# EAGLE board screenModule (EAGLE 7.5.0)
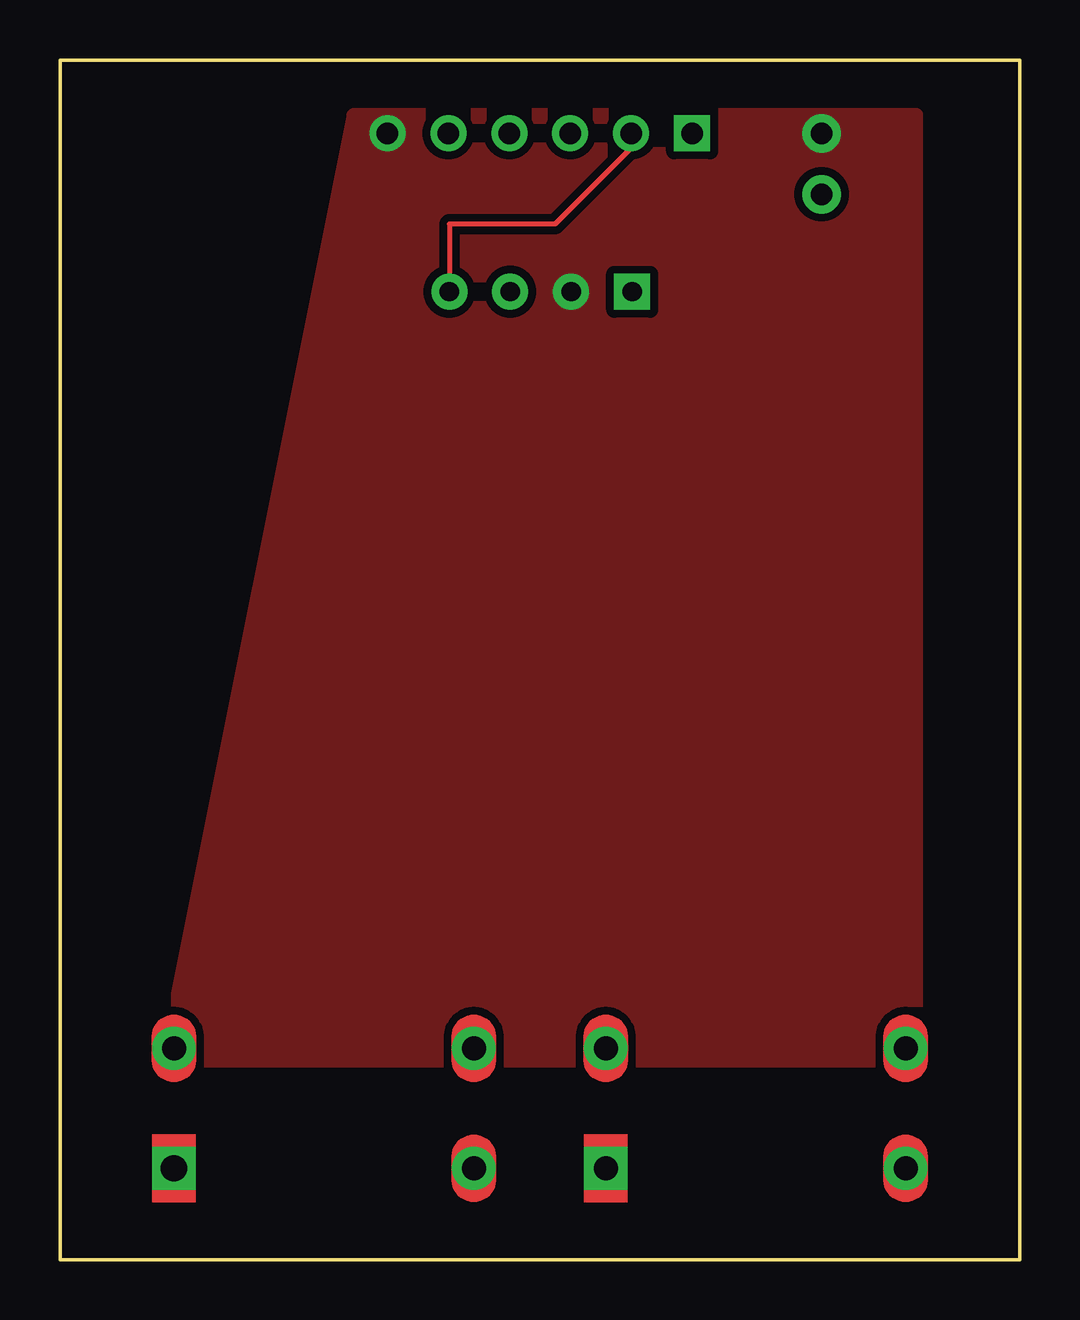
[diagram p0: board, top side]
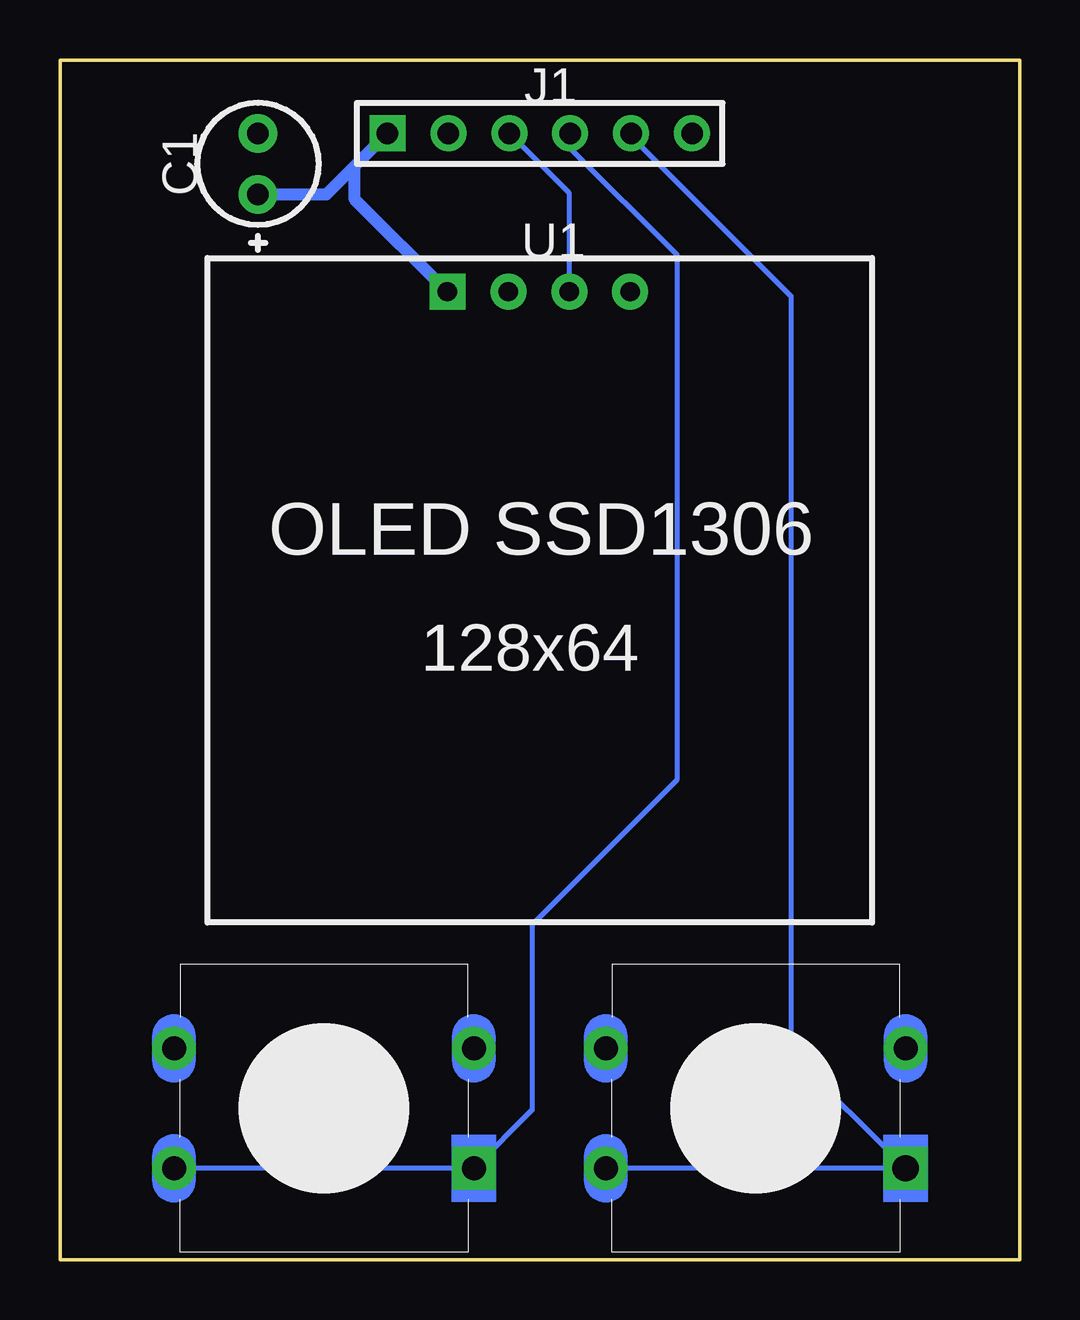
[diagram p1: board, bottom side, seen from below]

Size 40 x 50 mm. Coordinates in mm from the lower left corner, seen from the top.
Outline: 0,50 40,50 40,0 0,0 0,50
Copper layers (1*16): Top 0.035mm / dielectric 1.5mm / Bottom 0.035mm
Design rules "default *": minimum track width 10mil, minimum drill 0.61mm, track to track 8mil, track to pad 8mil, pad to pad 8mil, via to via 8mil, smd to smd 8mil, copper to edge 40mil, drill to drill 8mil, minimum pad ring 0mil, minimum via ring 8mil, stop-mask expansion 2mil, vias tented up to drill 19mil, thermal gap 10mil
Net classes: 0 Default: width 0.2 mm, clearance 0.2 mm, clearance 0.2 mm to class 1; 1 POWER: width 0.5 mm, clearance 0.2 mm, clearance 0.2 mm to class 0

## Footprints (pad centres in the part's own frame; a part is rotated, then mirrored left to right if it is on the bottom)
CAPPR-2.54/5.08 = drill 0.9 pad 1.6: 1 -1.27,0; 2 1.27,0
HDR-1x6 = drill 0.9 pad 1.5 square: 1 -6.35,0 | drill 0.9 pad 1.5: 2 -3.81,0; 3 -1.27,0; 4 1.27,0; 5 3.81,0; 6 6.35,0
PAD_PAD1 = drill 1.1 pad 1.8 square: 1 0,0
PAD_PAD2 = drill 1 pad 1.8: 2 0,0
PAD = drill 1 pad 1.8 square: 1 0,0
OLED_SSD1306 = drill 0.8 pad 1.5 square: 1 -3.85,12.45 | drill 0.8 pad 1.5: 2 -1.31,12.45; 3 1.23,12.45; 4 3.77,12.45

## Placement (x,y rotation side)
C1  4.7uF  [CAPPR-2.54/5.08]  31.75,45.67 90 bottom
J1  HDR-1X6  [HDR-1x6]  20,46.94 0 bottom
PAD1  PAD  [PAD_PAD1]  4.75,3.8 180 bottom
PAD2  PAD  [PAD_PAD2]  17.25,3.8 180 bottom
PAD3  PAD  [PAD_PAD2]  4.75,8.8 180 bottom
PAD4  PAD  [PAD_PAD2]  17.25,8.8 180 bottom
PAD5  PAD  [PAD]  22.75,3.8 180 bottom
PAD6  PAD  [PAD_PAD2]  35.25,3.8 180 bottom
PAD7  PAD  [PAD_PAD2]  22.75,8.8 180 bottom
PAD8  PAD  [PAD_PAD2]  35.25,8.8 180 bottom
U1  OLED SSD1306 128X64  [OLED_SSD1306]  20,27.89 0 bottom

## Library data of the parts
C1 J1 PAD1-PAD8 = common
U1 = common; DATASHEET: shop.adafruit.com/datasheets/SSD1306.pdf

## Nets
Net_0 [POWER]: C1.2 J1.6 PAD3.3 PAD4.4 PAD7.3 PAD8.4 U1.2
Net_1 [POWER]: C1.1 J1.1 U1.1
Net_2: J1.2 U1.4
Net_3: J1.3 U1.3
Net_5: J1.5 PAD1.1 PAD2.2
Net_6: J1.4 PAD5.1 PAD6.2

## Tracks (layer width: path | path; a pad name or v marks a point on that pad's centre or on a via)
Net_0
  pour Top (isolate 0.33, no thermals): 35.68,47.68 12.26,47.68 4.39,8.32 35.68,8.32
Net_1
  Bottom 0.5: C1.1 28.89,44.4 27.73,45.56 | 27.73,45.56 | 27.73,45.56 J1.1 | 27.73,45.56 27.73,44.23 U1.1
Net_2
  Top 0.2: J1.2 23.81,46.33 20.64,43.16 16.23,43.16 U1.4
Net_3
  Bottom 0.2: U1.3 18.77,44.44 J1.3
Net_5
  Bottom 0.2: J1.5 16.19,46.82 9.53,40.16 9.53,8.58 PAD1.1 PAD2.2
Net_6
  Bottom 0.2: J1.4 18.73,46.33 14.29,41.89 14.29,19.98 20.32,13.95 20.32,6.23 PAD5.1 PAD6.2

## Text on the board
bPlace: J1 | C1 | U1 | OLED SSD1306